# EAGLE board gps-1350-manu (EAGLE 7.5.0)
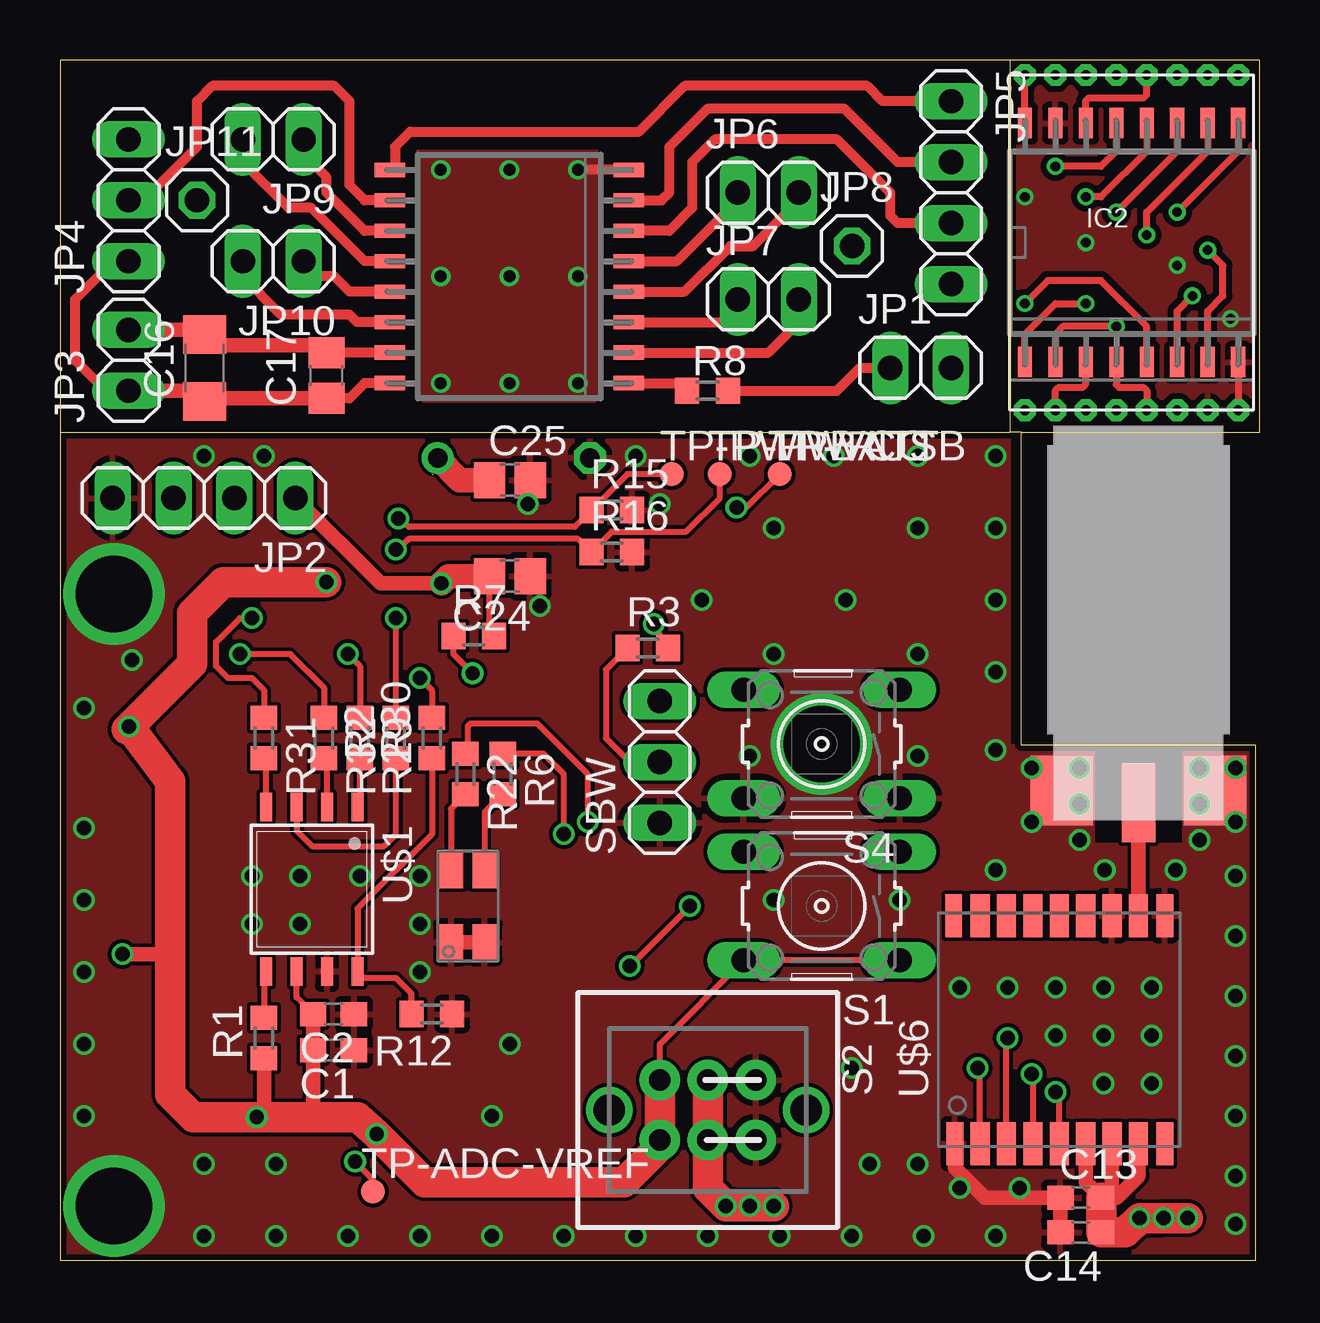
[diagram p0: board, top side]
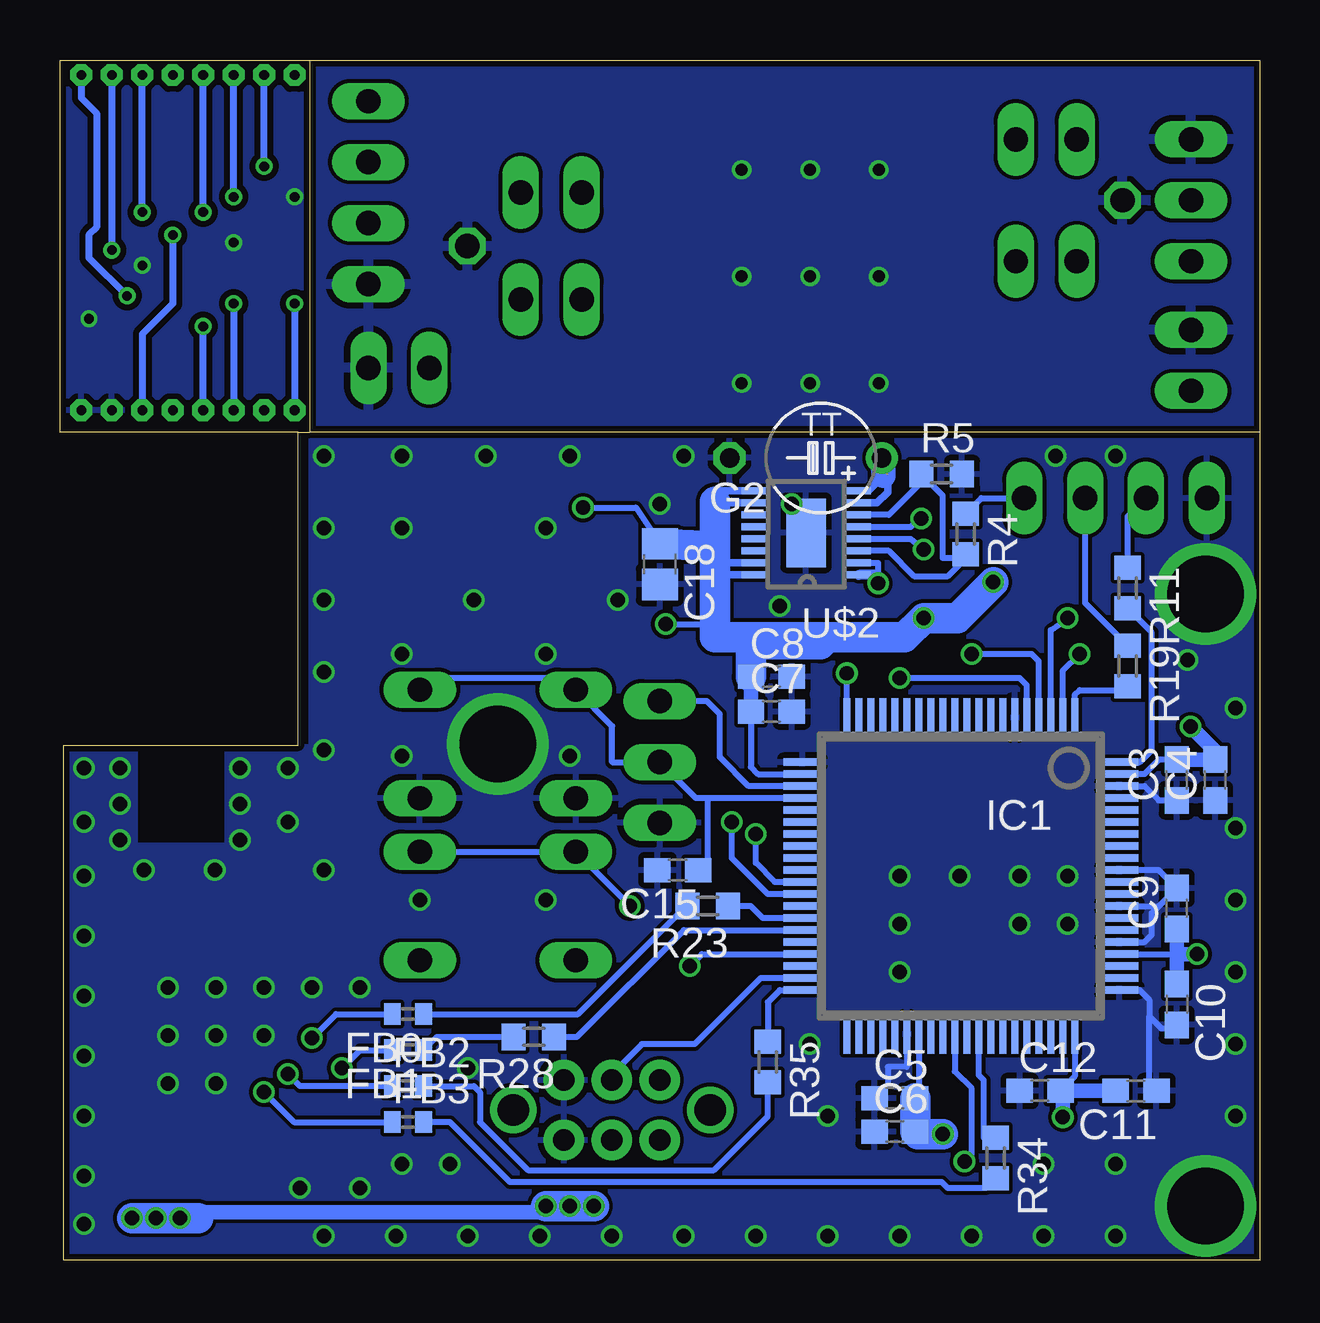
[diagram p1: board, bottom side, seen from below]

Size 50 x 50 mm. Coordinates in mm from the lower left corner, seen from the top.
Outline: 40.07,34.5 40.07,21.45 49.85,21.45 49.85,0 0,0 0,34.5
Outline: 40.07,34.5 39.6,34.5
Outline: 0,34.5 39.6,34.5
Outline: 39.6,50 0,50 0,34.5
Outline: 40.07,34.5 50,34.5 50,50 39.6,50
Outline: 39.6,50 39.6,34.5
Copper layers (1*16): Top 0.035mm / dielectric 1.5mm / Bottom 0.035mm
Design rules "SeeedStudio_2layer_DRU_no_angle_20140221": minimum track width 6mil, minimum drill 12mil, track to track 6mil, track to pad 6mil, pad to pad 6mil, via to via 6mil, smd to smd 0mil, copper to edge 10mil, drill to drill 10mil, minimum pad ring 10mil, minimum via ring 6mil, stop-mask expansion 2mil, vias tented up to drill 100mil, thermal gap 10mil
Net classes: 0 signal: width 0.254 mm, drill 0.254 mm, clearance 0.025 mm; 1 charimp50: width 0.61 mm, drill 0.254 mm, clearance 0.559 mm

## Footprints (pad centres in the part's own frame; a part is rotated, then mirrored left to right if it is on the bottom)
C0603 = smd 1.1 x 1: 1 -0.85,0; 2 0.85,0
C_1206 = smd 1.6 x 1.8: 1 -1.4,0; 2 1.4,0
C_0805 = smd 1.3 x 1.5: 1 -0.95,0; 2 0.95,0
C0805 = smd 1.3 x 1.5: 1 -0.85,0; 2 0.85,0
R0402 = smd 0.7 x 0.9: 1 -0.65,0; 2 0.65,0
TAP5-45 = drill 0.813: + -2.54,0 | drill 0.813 octagon: - 3.81,0
PN_S-PQFP-G80 = smd 0.3 x 1.6: 1 -4.75,-6.6; 2 -4.25,-6.6; 3 -3.75,-6.6; 4 -3.25,-6.6; 5 -2.75,-6.6; 6 -2.25,-6.6; 7 -1.75,-6.6; 8 -1.25,-6.6; 9 -0.75,-6.6; 10 -0.25,-6.6; 11 0.25,-6.6; 12 0.75,-6.6; 13 1.25,-6.6; 14 1.75,-6.6; 15 2.25,-6.6; 16 2.75,-6.6; 17 3.25,-6.6; 18 3.75,-6.6; 19 4.25,-6.6; 20 4.75,-6.6; 41 4.75,6.6; 42 4.25,6.6; 43 3.75,6.6; 44 3.25,6.6; 45 2.75,6.6; 46 2.25,6.6; 47 1.75,6.6; 48 1.25,6.6; 49 0.75,6.6; 50 0.25,6.6; 51 -0.25,6.6; 52 -0.75,6.6; 53 -1.25,6.6; 54 -1.75,6.6; 55 -2.25,6.6; 56 -2.75,6.6; 57 -3.25,6.6; 58 -3.75,6.6; 59 -4.25,6.6; 60 -4.75,6.6 | smd 1.6 x 0.3: 21 6.6,-4.75; 22 6.6,-4.25; 23 6.6,-3.75; 24 6.6,-3.25; 25 6.6,-2.75; 26 6.6,-2.25; 27 6.6,-1.75; 28 6.6,-1.25; 29 6.6,-0.75; 30 6.6,-0.25; 31 6.6,0.25; 32 6.6,0.75; 33 6.6,1.25; 34 6.6,1.75; 35 6.6,2.25; 36 6.6,2.75; 37 6.6,3.25; 38 6.6,3.75; 39 6.6,4.25; 40 6.6,4.75; 61 -6.6,4.75; 62 -6.6,4.25; 63 -6.6,3.75; 64 -6.6,3.25; 65 -6.6,2.75; 66 -6.6,2.25; 67 -6.6,1.75; 68 -6.6,1.25; 69 -6.6,0.75; 70 -6.6,0.25; 71 -6.6,-0.25; 72 -6.6,-0.75; 73 -6.6,-1.25; 74 -6.6,-1.75; 75 -6.6,-2.25; 76 -6.6,-2.75; 77 -6.6,-3.25; 78 -6.6,-3.75; 79 -6.6,-4.25; 80 -6.6,-4.75
FLAT16-ADP = drill 0.4 octagon: 1 -4.445,-6.985; 2 -3.175,-6.985; 3 -1.905,-6.985; 4 -0.635,-6.985; 5 0.635,-6.985; 6 1.905,-6.985; 7 3.175,-6.985; 8 4.445,-6.985; 9 4.445,6.985; 10 3.175,6.985; 11 1.905,6.985; 12 0.635,6.985; 13 -0.635,6.985; 14 -1.905,6.985; 15 -3.175,6.985; 16 -4.445,6.985
1X02 = drill 1.016 long: 1 -1.27,0; 2 1.27,0
1X04 = drill 1.016 long: 1 -3.81,0; 2 -1.27,0; 3 1.27,0; 4 3.81,0
1X03 = drill 1.016 long: 1 -2.54,0; 2 0,0; 3 2.54,0
1X01 = drill 1.016 octagon: 1 0,0
BILED = smd 1.5 x 1: 1 -1.5,0.7; 2 1.5,0.7; 3 -1.5,-0.7; 4 1.5,-0.7
R0603 = smd 1 x 1.1: 1 -0.85,0; 2 0.85,0
R_0603 = smd 1 x 1.1: 1 -0.85,0; 2 0.85,0
B3F-10XX = drill 1.016 long: 1 -3.251,2.261; 2 3.251,2.261; 3 -3.251,-2.261; 4 3.251,-2.261
2P2T = drill 0.9 pad 1.676: 1.1 -2,1.25; 1.2 -2,-1.25; 2.1 0,1.25; 2.2 0,-1.25; 3.1 2,1.25; 3.2 2,-1.25 | drill 1.3 pad 1.93: 3.3 4.1,0; 3.4 -4.1,0
TP10R = smd 1 x 1: TP 0,0
JSOP-08 = smd 0.5 x 1.2: 1 -1.905,-3.429; 2 -0.635,-3.429; 3 0.635,-3.429; 4 1.905,-3.429; 5 1.913,3.429; 6 0.643,3.429; 7 -0.627,3.429; 8 -1.897,3.429
MSOP16 = smd 1 x 0.3: 1 -2.2,1.75; 2 -2.2,1.25; 3 -2.2,0.75; 4 -2.2,0.25; 5 -2.2,-0.25; 6 -2.2,-0.75; 7 -2.2,-1.25; 8 -2.2,-1.75; 9 2.2,-1.75; 10 2.2,-1.25; 11 2.2,-0.75; 12 2.2,-0.25; 13 2.2,0.25; 14 2.2,0.75; 15 2.2,1.25; 16 2.2,1.75 | smd 1.65 x 2.85: EXP 0,0
SO16-WS = smd 0.6 x 1.27: 1 -4.445,-4.981; 2 -3.175,-4.981; 3 -1.905,-4.981; 4 -0.635,-4.981; 5 0.635,-4.981; 6 1.905,-4.981; 7 3.175,-4.981; 8 4.445,-4.981; 9 4.445,4.981; 10 3.175,4.981; 11 1.905,4.981; 12 0.635,4.981; 13 -0.635,4.981; 14 -1.905,4.981; 15 -3.175,4.981; 16 -4.445,4.981
MWSL1350 = smd 2.6 x 2.9: P$1 -3.2,-1.45; P$3 3.2,-1.45 | smd 1.4 x 3.3: P$2 0,-1.95
MAX-8 = smd 1.8 x 0.7: 1 9.6,0.7; 9 9.6,9.45; 10 0.1,9.45; 18 0.1,0.65 | smd 1.8 x 0.8: 2 9.6,1.75; 3 9.6,2.85; 4 9.6,3.95; 5 9.6,5.05; 6 9.6,6.15; 7 9.6,7.25; 8 9.6,8.35; 11 0.1,8.35; 12 0.1,7.25; 13 0.1,6.15; 14 0.1,5.05; 15 0.1,3.95; 16 0.1,2.85; 17 0.1,1.75

## Placement (x,y rotation side)
C1  1u  [C0603]  11.4,8.75 180 top
C2  100n  [C0603]  11.4,10.25 180 top
C3  100n  [C0603]  3.45,20 90 bottom
C4  1u  [C0603]  1.85,20 90 bottom
C5  100n  [C0603]  15.2,6.75 0 bottom
C6  1u  [C0603]  15.2,5.35 0 bottom
C7  100n  [C0603]  20.35,22.85 0 bottom
C8  1u  [C0603]  20.35,24.3 0 bottom
C9  100n  [C0603]  3.45,14.65 90 bottom
C10  1u  [C0603]  3.45,10.65 270 bottom
C11  100n  [C0603]  5.15,7.05 180 bottom
C12  1u  [C0603]  9.15,7.05 0 bottom
C13  100n  [C0603]  42.55,2.6 0 top
C14  1u  [C0603]  42.55,1.15 180 top
C15  1 n  [C0603]  24.25,16.25 180 bottom
C16  1uF  [C_1206]  6.03,37.17 90 top
C17  100nF  [C_0805]  11.11,36.85 90 top
C18  4.7uF at least  [C0805]  25,29 270 bottom
C24  4.7uF  [C0805]  18.75,28.5 180 top
C25  4.7uF at least  [C0805]  18.75,32.5 0 top
FB0  [R0402]  35.5,10.25 180 bottom
FB1  [R0402]  35.5,8.75 180 bottom
FB2  [R0402]  35.5,7.25 0 bottom
FB3  [R0402]  35.5,5.75 0 bottom
G2  BATTERYTAP5-45  [TAP5-45]  18.28,33.42 180 bottom
IC1  MSP430FR698X(1)80-PIN_PN  [PN_S-PQFP-G80]  12.45,16 180 bottom
IC2  74HC4051ADP  [FLAT16-ADP]  44.66,42.39 0 top
JP1  [1X02]  35.88,37.17 0 top
JP2  [1X04]  6,31.75 180 top
JP3  [1X02]  2.85,37.49 90 top
JP4  [1X03]  2.85,44.16 90 top
JP5  [1X04]  37.15,44.47 270 top
JP6  [1X02]  29.52,44.47 0 top
JP7  [1X02]  29.52,40.03 0 top
JP8  [1X01]  33.02,42.25 0 top
JP9  [1X02]  8.89,46.7 180 top
JP10  [1X02]  8.89,41.62 180 top
JP11  [1X01]  5.71,44.16 0 top
LED1  [BILED]  17,14.75 90 top
R1  470k  [R0603]  8.5,9.25 90 top
R2  470k  [R0603]  14,21.75 90 top
R3  47k  [R0603]  24.5,25.5 0 top
R4  100k  [R0603]  12.25,30.25 270 bottom
R5  39.2k  [R0603]  13.25,32.75 0 bottom
R6  160  [R0603]  18.45,20.25 270 top
R7  100  [R0603]  17.25,26 0 top
R8  [R_0603]  26.98,36.22 0 top
R11  100  [R0603]  5.5,28 270 bottom
R12  470k  [R0603]  15.5,10.25 180 top
R15  1k  [R0603]  23,31.25 0 top
R16  1k  [R0603]  23,29.5 0 top
R19  100  [R0603]  5.5,24.75 270 bottom
R22  180  [R0603]  16.9,20.25 270 top
R23  100  [R0603]  23,14.75 180 bottom
R28  100  [R0603]  30.25,9.3 180 bottom
R29  100  [R0603]  12.5,21.75 270 top
R30  100  [R0603]  15.5,21.75 90 top
R31  100  [R0603]  8.5,21.75 270 top
R32  100  [R0603]  11,21.75 270 top
R34  0  [R0603]  11,4.25 270 bottom
R35  0  [R0603]  20.5,8.25 270 bottom
S1  [B3F-10XX]  31.75,14.75 180 top
S2  2P2T  [2P2T]  27,6.25 180 top
S4  RESET  [B3F-10XX]  31.75,21.5 180 top
SBW  [1X03]  25,20.75 90 top
TP-ADC-VREF  TPSQTP10R  [TP10R]  13.05,2.85 0 top
TP-PWRBATT  TPSQTP10R  [TP10R]  25.5,32.75 0 top
TP-PWRUSB  TPSQTP10R  [TP10R]  27.5,32.75 0 top
TP-VCC  TPSQTP10R  [TP10R]  30,32.75 0 top
U$1  AT45DB641E-SHNJSOP-08  [JSOP-08]  10.5,15.45 180 top
U$2  LTC4415  [MSOP16]  18.9,30.3 180 bottom
U$3  RHD5928  [SO16-WS]  18.73,40.98 90 top
U$4  RHD5928  [SO16-WS]  44.66,42.39 0 top
U$5  MWSL1251MWSL1350  [MWSL1350]  44.95,21.01 0 top
U$6  MAX-8C-0  [MAX-8]  36.6,14.45 270 top

## Library data of the parts
C1-C15 C18 C24 C25 = tagps; SPICEPREFIX: C
C16 C17 IC2 JP1 JP3 JP6 JP7 JP9 JP10 R8 U$3 U$4 = juice
FB0 FB1-FB3 R1-R7 R11 R12 R15 R16 R19 R22 R23 R28-R32 R34 R35 = tagps; SPICEPREFIX: R
G2 IC1 JP2 LED1 S2 SBW TP-ADC-VREF TP-PWRBATT TP-PWRUSB TP-VCC U$1 U$2 U$5 U$6 = tagps
JP4 JP5 JP8 JP11 = pinhead
S1 S4 = tagps; MPN: B3F-1000; OC_FARNELL: 176432; OC_NEWARK: 36M3542

## Nets
!EN: JP4.2 U$3.10
!EN1: IC2.6 U$4.10
+5V: C16.1 C17.1 JP3.1 JP4.1 U$3.16
+5V1: IC2.16 U$4.16
A0: JP5.1 U$3.9
A1: JP5.2 U$3.7
A2: JP5.3 U$3.6
A3: IC2.11 U$4.9
A4: IC2.10 U$4.7
A5: IC2.9 U$4.6
ADC-BATT: R15.1 TP-PWRBATT.TP U$2.5
ADC-VREF: IC1.50 TP-ADC-VREF.TP
GND: C1.1 C2.1 C3.1 C4.1 C5.1 C6.1 C7.2 C8.2 C9.2 C10.2 C11.1 C12.1 C13.1 C14.2 C15.2 C18.2 C24.1 C25.2 G2.- IC1.6 IC1.21 IC1.46 IC1.61 IC1.65 IC1.68 IC1.71 IC1.78 JP2.4 LED1.1 LED1.3 R5.2 R12.1 R15.2 R16.2 S2.1.1 S2.1.2 S4.1 S4.2 SBW.1 U$1.7 U$2.EXP U$5.P$1 U$5.P$3 U$6.1 U$6.10 U$6.12
GND1: C16.2 C17.2 JP1.2 JP3.2 JP4.3 JP5.4 JP8.1 JP11.1 U$3.8 U$3.15
GND2: IC2.7 IC2.8 U$4.8 U$4.15
LED1: IC1.32 R22.1
LED2: IC1.31 R6.1
MB-GPS-RX: FB0.1 R23.2
MB-GPS-TIMEPULSE: IC1.40 R35.1
MB-GPS-TX: FB1.1 R28.2
MB-GPS-WAKEUP: IC1.52 R34.1
MB-PWR_GPS_SENSE: C13.2 C14.1 IC1.39 S2.2.1 S2.2.2 U$6.6 U$6.7 U$6.8
MCU-RX-FT232: IC1.1 R19.2
MCU-TX-FT232: JP2.3 R11.1
N$1: R8.1 U$3.1
N$2: IC1.80 R11.2
N$7: R4.2 R5.1 U$2.3 U$2.6
N$25: R2.1 U$1.3
N$26: R1.2 U$1.5
N$27: R16.1 TP-PWRUSB.TP U$2.4
N$30: IC1.4 R29.1
N$31: R12.2 R30.1 U$1.8
N$35: IC1.3 R31.1
N$36: IC1.2 R32.1
N$37: LED1.4 R6.2
N$38: LED1.2 R22.2
N$40: IC1.34 R23.1
N$42 [charimp50]: U$5.P$2 U$6.11
N$43: JP2.2 R19.1
N$46: FB3.2 R34.2
N$47: FB2.2 R35.2
N$48: IC1.35 R28.1
N$49: FB0.2 U$6.3
N$50: FB1.2 U$6.2
N$51: FB2.1 U$6.4
N$52: FB3.1 U$6.5
PWR-USB-SENSE: IC1.20 R7.1
SBW-TCK: IC1.23 SBW.3
SBW-TDO/TDI: C15.1 IC1.24 R3.1 S4.3 S4.4 SBW.2
SPICLK: R32.2 U$1.2
SPICSN: R31.2 U$1.4
SPISI: R29.2 U$1.1
SPISO: IC1.5 R30.2
SW-CFG-GPS: IC1.37 S1.3 S1.4
VCC: C1.2 C2.2 C3.2 C4.2 C5.2 C6.2 C7.1 C8.1 C9.1 C10.1 C11.2 C12.2 C18.1 IC1.22 IC1.47 IC1.60 IC1.64 IC1.79 R1.1 R2.2 R3.2 S1.1 S1.2 S2.3.1 S2.3.2 TP-VCC.TP U$1.6 U$2.9 U$2.10 U$2.15 U$2.16
VCC_BATT_IN: C25.1 G2.+ U$2.7 U$2.8
VCCUSBGPS: C24.2 JP2.1 R4.1 R7.2 U$2.1 U$2.2
X: JP1.1 R8.2
X0: JP9.1 U$3.11
X1: JP9.2 U$3.12
X2: JP10.1 U$3.13
X3: JP10.2 U$3.14
X4: JP6.1 U$3.5
X5: JP6.2 U$3.4
X6: JP7.1 U$3.3
X7: JP7.2 U$3.2
X8: IC2.13 U$4.11
X9: IC2.14 U$4.12
X10: IC2.15 U$4.13
X11: IC2.12 U$4.14
X12: IC2.1 U$4.5
X13: IC2.5 U$4.4
X14: IC2.2 U$4.3
X15: IC2.4 U$4.2
X16: IC2.3 U$4.1

## Tracks (layer width: path | path; a pad name or v marks a point on that pad's centre or on a via)
!EN
  Top 0.406: U$3.10 12.7,44.16 12.06,44.79 12.06,48.28 11.43,48.92 6.35,48.92 5.71,48.28 5.71,46.38 3.49,44.16 JP4.2
!EN1  (via drill 0.4)
  Top 0.3: U$4.10 47.84,46.2 45.3,43.66 v45.3,42.71
  Bottom 0.3: v45.3,42.71 45.3,39.85 46.57,38.58 IC2.6
+5V
  Top 0.406: JP4.1 2.22,41.62 0.63,40.03 0.63,37.49 1.9,36.22 JP3.1 | U$3.16 12.7,36.53 12.06,35.9 C17.1 | 6.16,35.9 C16.1
  Top 0.61: JP3.1 5.53,36.22 C16.1 | C17.1 6.16,35.9
+5V1
  Top 0.3: U$4.16 IC2.16
A0
  Top 0.406: JP5.1 34.29,48.28 33.65,48.92 26.03,48.92 24.13,47.01 14.6,47.01 13.97,46.38 13.97,45.64 U$3.9
A1
  Top 0.406: U$3.7 25.08,44.16 25.4,44.47 25.4,46.38 26.98,47.97 32.7,47.97 34.92,45.74 JP5.2
A2
  Top 0.406: JP5.3 34.92,43.2 34.6,43.52 34.6,44.47 32.38,46.7 27.3,46.7 26.35,45.74 26.35,43.84 25.4,42.88 U$3.6
A3  (via drill 0.4)
  Top 0.3: U$4.9 49.11,46.2 v46.57,43.66
  Bottom 0.3: v46.57,43.66 IC2.11
A4  (via drill 0.4)
  Top 0.3: U$4.7 47.84,39.53 48.48,40.17 48.48,41.44 v47.84,42.08
  Bottom 0.3: IC2.10 v47.84,42.08
A5  (via drill 0.4)
  Top 0.3: U$4.6 46.57,39.53 v47.2,40.17
  Bottom 0.3: v47.2,40.17 48.79,41.76 48.79,42.71 48.48,43.03 48.48,47.79 49.11,48.42 IC2.9
ADC-BATT  (via drill 0.6)
  Top 0.254: v14.1,30.9 14.55,30.55 21.45,30.55 R15.1 23.65,32.75 TP-PWRBATT.TP
  Bottom 0.254: U$2.5 14.55,30.55 v14.1,30.9
ADC-VREF  (via drill 0.6)
  Top 0.254: TP-ADC-VREF.TP 13.05,3.35 v12.3,4.1
  Bottom 0.254: IC1.50 12.7,7.85 12,7.15 12,4.4 v12.3,4.1
GND  (via drill 0.6, 3.2 pad 3.81)
  Top 0.254: U$6.12 43.73,14.23
  Top 0.61: LED1.1 LED1.3 | U$6.1 37.3,3.85 38.55,2.6 C13.1 C14.2
  Bottom 0.254: 19.2,20.75 IC1.21 | 16.2,7.1 C5.1 15.5,7.3 15.5,8.05 14.7,8.05 IC1.46 | IC1.61 5,11.25 4.6,10.85 4.6,10.15 | 4.6,10.15 4.1,9.65 3.6,9.65 C10.2 | IC1.78 4.8,19.75 4.2,19.15 C3.1 | 4.3,7.15 4.6,7.45 4.6,10.15 | IC1.71 4.2,16.25 C9.2 4.2,14.75 | IC1.68 4.2,14.75 | IC1.65 4.8,13.25 4.5,13.55 4.5,14.45 4.2,14.75
  other vias: 15,12 8,14 10,14 15,14 15,16 12.5,16 10,16 8,16 39,30.5 45.5,11.35 43.5,11.35 41.5,11.35 45.5,9.35 43.5,9.35 43.5,7.35 41.5,9.35 45.5,7.35 39.5,11.35 37.5,11.35 32.25,33.5 42.5,17.5 43.55,16.25 49,20.5 47.5,20.5 39,27.5 25,31.5 39,33.5 35.75,33.5 35.75,30.5 20,27.25 19.5,31.5 39,24.5 39,21.25 40.5,20.5 42.5,20.5 42.5,19 49,18.25 49,16 47.5,19 47.5,17.5 46.5,16.25 49,13.5 49,11 49,8.5 49,6 49,3.5 49,1.5 39,1 39,16.25 40.5,18.25 36,1 33,1 27,1 30,1 24,1 21,1 18,1 15,1 12,1 9,1 6,1 6,4 9,4 1,6 1,9 1,12 1,15 1,18 1,23 3,25 35.75,4 33.75,4 33,8 35,15 29.75,15 18,6 18.75,9 32.75,27.5 35.75,21 31.75,21.5 2.25,2.25 2.25,27.75 40,3 37.5,3 29.75,30.5 28.75,33.5 24,33.5 8.5,33.5 6,33.5 26.75,27.5 28.75,21 35.75,25.25 29.75,25.25
  pour Top: -1.35,35.35 38.75,35.25 41.65,34.65 41.5,21.5 37.25,21.5 37.25,17.1 39,17.1 50.75,17.35 51.15,-2 -1.1,-2.25
  pour Bottom: -2.8,36 50.35,35.4 51.05,-1.05 -3.2,-1.4 -3,4.5 -3,7.5
  pour Top (no thermals): 37.25,22 51.25,22 51.25,16.75 37.25,16.75
GND1  (via drill 0.5)
  Top 0.406: U$3.8 v21.59,45.42 | C16.2 6.22,38.57 | 10.79,38.12 C17.2 U$3.15
  Top 0.61: JP3.2 5.84,38.76 C16.2 | 6.22,38.57 6.67,38.12 10.79,38.12
  other vias: 15.87,45.42 15.87,36.53 21.59,36.53 15.87,40.98 21.59,40.98 18.73,40.98 18.73,45.42 18.73,36.53
  pour Bottom: 0.32,49.87 39.37,49.87 39.37,34.95 0.32,34.95
  pour Top (isolate 0.5): 15.24,35.9 15.08,46.27 22.22,46.27 22.22,35.9
GND2  (via drill 0.4)
  Top 0.3: U$4.8 IC2.8
  other vias: 42.76,42.39 46.57,41.44 40.22,44.3 48.79,39.22
  pour Bottom (isolate 0.25): 39.59,49.38 49.74,49.38 49.74,35.41 39.59,35.41
  pour Top (isolate 0.25): 39.59,49.38 49.74,49.38 49.74,35.41 39.59,35.41
LED1  (via drill 0.6)
  Top 0.254: R22.1 17,21.2 17,22.25 17.1,22.35 19.9,22.35 22,20.25 v22,18.25
  Bottom 0.254: IC1.32 20.5,15.25 22,16.75 v22,18.25
LED2  (via drill 0.6)
  Top 0.254: v21,17.75 21,20.25 20.15,21.1 R6.1
  Bottom 0.254: IC1.31 20.2,15.75 21,16.55 v21,17.75
MB-GPS-RX
  Bottom 0.254: R23.2 23.9,14.75 28.4,10.25 FB0.1
MB-GPS-TIMEPULSE
  Bottom 0.254: IC1.40 20,11.25 20.5,10.75 R35.1
MB-GPS-TX
  Bottom 0.254: FB1.1 34.3,9.3 R28.2
MB-GPS-WAKEUP
  Bottom 0.254: IC1.52 11.7,7.7 11.5,7.5 11.5,5.1 R34.1
MB-PWR_GPS_SENSE  (via drill 0.6)
  Top 0.254: 44.05,2.6 C13.2
  Top 0.61: U$6.7 43.85,3.05 C13.2 42.75,3.25 U$6.6 | 44.05,2.6 44.95,3.5 U$6.8
  Top 1.27: C13.2 C14.1 44.4,1.15 v45,1.75 v46,1.75 v47,1.75 | S2.2.2 S2.2.1 27,3 v27.75,2.25 v28.75,2.25 v29.75,2.25
  Bottom 0.254: IC1.39 20.8,11.75 23.55,9 25.75,9 27,7.75 S2.2.2
  Bottom 0.61: v29.75,2.25 arc90 30,2 44,2 44.25,1.75
  Bottom 1.27: v27.75,2.25 v28.75,2.25 v29.75,2.25 | 44.25,1.75 v45,1.75 v47,1.75
MCU-RX-FT232
  Bottom 0.254: IC1.1 7.7,23.55 7.5,23.75 5.65,23.75 R19.2
MCU-TX-FT232
  Bottom 0.254: R11.1 5.5,30.98 JP2.3
N$1
  Top 0.406: U$3.1 25.82,36.53 R8.1
N$2
  Bottom 0.254: IC1.80 5,20.75 4.5,21.25 4.5,26.15 R11.2
N$7
  Bottom 0.254: U$2.3 15.45,29.55 14.4,28.5 13,28.5 12.25,29.25 | U$2.6 15.45,31.05 14.1,32.4 R5.1 13.2,31.85 13.2,29.25 12.25,29.25 | 12.25,29.25 R4.2
N$25
  Top 0.254: U$1.3 9.87,17.89 10.5,17.25 13.5,17.25 14,17.75 R2.1
N$26
  Top 0.254: U$1.5 8.5,11.93 R1.2
N$27  (via drill 0.6)
  Top 0.254: v14,29.6 14.55,30.05 21.6,30.05 R16.1 23,30.35 26.1,30.35 27.5,31.75 TP-PWRUSB.TP
  Bottom 0.254: U$2.4 14.55,30.05 v14,29.6
N$30  (via drill 0.6)
  Top 0.254: v12,25.25 12.5,24.75 R29.1
  Bottom 0.254: IC1.4 9.2,24.95 9.5,25.25 v12,25.25
N$31
  Top 0.254: R30.1 15.5,17.75 12.4,14.65 U$1.8 | 12.5,11.92 U$1.8 | R12.2 14.65,11.1 14,11.75 12.67,11.75 U$1.8
N$35  (via drill 0.6)
  Top 0.254: R31.1 8.5,23.75 8,24.25 7,24.25 6.5,24.75 6.5,25.75 7.5,26.75 v8,26.75
  Bottom 0.254: IC1.3 8.7,26.25 v8,26.75
N$36  (via drill 0.6)
  Top 0.254: R32.1 11,23.85 9.6,25.25 v7.5,25.25
  Bottom 0.254: IC1.2 8.2,24.55 v7.5,25.25
N$37
  Top 0.254: R6.2 17.7,18.65 LED1.4
N$38
  Top 0.254: R22.2 16.3,18.8 LED1.2
N$40
  Bottom 0.254: IC1.34 20.7,14.25 21.2,14.75 R23.1
N$42
  Top 0.61: 44.9,14.35 U$6.11 U$5.P$2
N$43
  Bottom 0.254: R19.1 7.27,27.37 JP2.2
N$46
  Bottom 0.254: R34.2 11.4,3 13,3 13.25,3.25 31.25,3.25 33.75,5.75 FB3.2
N$47
  Bottom 0.254: R35.2 20.5,6 22.75,3.75 30.5,3.75 32.5,5.75 32.5,7 32.75,7.25 FB2.2
N$48
  Bottom 0.254: IC1.35 24,13.75 28.45,9.3 R28.1
N$49  (via drill 0.6)
  Top 0.254: U$6.3 39.45,9.2 v39.5,9.25
  Bottom 0.254: v39.5,9.25 38.5,10.25 FB0.2
N$50  (via drill 0.6)
  Top 0.254: U$6.2 38.35,7.9 v38.25,8
  Bottom 0.254: v38.25,8 37.5,8.75 FB1.2
N$51  (via drill 0.6)
  Top 0.254: v40.5,7.75 40.55,7.7 U$6.4
  Bottom 0.254: FB2.1 40,7.25 v40.5,7.75
N$52  (via drill 0.6)
  Top 0.254: U$6.5 41.65,6.85 v41.5,7
  Bottom 0.254: v41.5,7 40.25,5.75 FB3.1
PWR-USB-SENSE  (via drill 0.6)
  Top 0.254: v17.2,24.45 16.4,25.25 R7.1
  Bottom 0.254: 17.2,22 IC1.20 v17.2,24.45
SBW-TCK
  Bottom 0.254: IC1.23 21.3,19.75 22.5,20.95 22.5,22.75 23.04,23.29 SBW.3
SBW-TDO/TDI
  Top 0.254: R3.1 22.75,24.6 22.75,21.75 23.75,20.75 SBW.2
  Bottom 0.254: IC1.24 23,19.25 | 23,19.25 23.5,19.25 SBW.2 26.99,20.75 26.99,22.25 S4.4 28.99,24.25 34.51,24.25 S4.3 | C15.1 23,16.65 23,19.25
SPICLK
  Top 0.254: U$1.2 11.13,20.9 R32.2
SPICSN
  Top 0.254: U$1.4 8.6,20.9 R31.2
SPISI
  Top 0.254: U$1.1 12.5,18.97 R29.2
SPISO  (via drill 0.6)
  Top 0.254: v15,24.25 15.5,23.75 R30.2
  Bottom 0.254: IC1.5 9.7,23.95 10,24.25 v15,24.25
SW-CFG-GPS  (via drill 0.6)
  Top 0.254: v26.25,14.75 v23.75,12.25
  Bottom 0.254: S1.3 S1.4 26.25,14.76 v26.25,14.75 | v23.75,12.25 23.25,12.75 IC1.37
VCC  (via drill 0.6)
  Top 0.254: 4.8,12.75 4.6,12.55 | C2.2 9.86,10.94 U$1.6 | R2.2 v14,26.75 | R1.1 8.2,8.1 | S2.3.2 25,8.99 S1.2 S1.1 | R3.2 v24.75,26.5 | v28.2,31.35 28.6,31.35 TP-VCC.TP
  Top 0.61: C2.2 C1.2 10.55,6 10.5,5.95 | v2.6,12.75 4.8,12.75 | v8.2,5.95 8.5,6.25 R1.1
  Top 1.27: 2.77,22.12 v2.88,22.23 | v2.88,22.23 4.6,19.95 4.6,12.55 4.6,6.9 5.55,5.95 v8.2,5.95 10.5,5.95 12.4,5.95 v13.2,5.25 15.2,3.25 23.5,3.25 25,4.75 S2.3.1 S2.3.2 | v11.1,28.25 6.8,28.25 5.5,26.95 5.5,24.85 v2.88,22.23
  Bottom 0.254: IC1.47 14.2,6.75 C5.2 | C3.2 4.2,20.85 4.8,20.25 IC1.79 | IC1.64 3.45,12.75 | IC1.60 7.7,7.65 C12.2 | C7.1 21.2,20.55 20.9,20.25 IC1.22 | v28.2,31.35 26,31.35 C18.1 | v24.75,26.5 22.7,26.5 | 21.2,25.65 22.7,25.65 22.7,26.25 | 22.15,29.05 22.7,29.05 22.7,29.25 | 22.7,31.6 22.4,31.6 22.4,31.8
  Bottom 0.305: U$2.9 22.7,32.05 22.7,31.6 | U$2.10 22.15,31.55 22.4,31.8 | U$2.15 22.15,29.05 22.4,28.8 22.15,28.55 U$2.16
  Bottom 0.61: C8.1 C7.1 | C10.1 3.45,12.75 | 3.45,12.75 C9.1 | C3.2 C4.2 1.85,21.2 v2.88,22.23 | C11.2 C12.2 8.2,6.95 v8.2,5.95 | 3.45,12.75 v2.6,12.75
  Bottom 1.27: 12.7,26.75 v14,26.75 | v13.2,5.25 14.25,5.25 C6.2 C5.2 | v14,26.75 14.8,25.95 22.7,25.95 22.7,26.25 22.7,26.5 22.7,29.25 22.7,29.75 | 18.3,25.65 21.2,25.65 C8.1 | v11.1,28.25 12.6,26.75 v14,26.75 | 22.7,29.75 22.7,31.6 | C18.1 22.7,29.75
VCC_BATT_IN  (1 unrouted)
  Top 1.016: C25.1 16.66,32.5 G2.+
  Bottom 0.254: 15.8,32.5 15.55,32.75
  Bottom 0.305: U$2.8 16.3,32.05 15.68,32.67 15.55,32.8 15.5,32.75 15.5,32 15.95,31.55 U$2.7
  Bottom 1.016: G2.+ 15.68,32.85 15.68,32.67
VCCUSBGPS  (via drill 0.6)
  Top 0.254: R7.2 17.9,26.2 C24.2
  Top 0.61: JP2.1 13.36,28.2 v15.9,28.2
  Top 1.016: C24.2 16.2,28.5 v15.9,28.2
  Bottom 0.254: U$2.2 15.9,29.05 v15.9,28.2 | R4.1 11.6,31.75 JP2.1
  Bottom 0.406: U$2.1 15.95,28.55 15.9,28.5 v15.9,28.2
X
  Top 0.406: R8.2 32.38,36.22 33.34,37.17 JP1.1
X0
  Top 0.406: U$3.11 12.7,42.88 11.11,44.47 11.11,45.11 10.16,46.06 JP9.1
X1
  Top 0.406: U$3.12 12.7,41.62 10.47,43.84 9.52,43.84 7.62,45.74 JP9.2
X2
  Top 0.406: U$3.13 12.06,40.34 11.43,40.98 10.79,40.98 JP10.1
X3
  Top 0.406: U$3.14 12.38,39.08 12.06,39.39 9.21,39.39 7.62,40.98 JP10.2
X4
  Top 0.406: U$3.5 25.71,41.62 28.25,44.16 JP6.1
X5
  Top 0.406: U$3.4 26.03,40.34 27.94,42.25 28.89,42.25 30.8,44.16 JP6.2
X6
  Top 0.406: U$3.3 27.94,39.08 28.25,39.39 JP7.1
X7
  Top 0.406: U$3.2 29.52,37.8 30.8,39.08 JP7.2
X8  (via drill 0.4)
  Top 0.3: U$4.11 46.57,46.2 v44.03,43.66
  Bottom 0.3: v44.03,43.66 IC2.13
X9  (via drill 0.4)
  Top 0.3: U$4.12 45.3,46.2 43.4,44.3 v42.76,44.3
  Bottom 0.3: v42.76,44.3 IC2.14
X10  (via drill 0.4)
  Top 0.3: U$4.13 44.03,46.2 43.4,45.57 v41.49,45.57
  Bottom 0.3: v41.49,45.57 IC2.15
X11
  Top 0.3: U$4.14 42.76,48.3 42.88,48.42 45.17,48.42 45.3,48.55 IC2.12
X12  (via drill 0.4)
  Top 0.3: U$4.5 45.3,38.9 43.4,40.8 41.17,40.8 v40.22,39.85
  Bottom 0.3: v40.22,39.85 IC2.1
X13
  Top 0.3: U$4.4 44.03,36.48 44.16,36.36 45.17,36.36 45.3,36.23 IC2.5
X14
  Top 0.3: IC2.2 41.49,36.23 41.62,36.36 42.63,36.36 42.76,36.48 U$4.3
X15  (via drill 0.4)
  Top 0.3: v44.03,38.9 41.81,38.9 41.49,38.58 U$4.2
  Bottom 0.3: IC2.4 v44.03,38.9
X16  (via drill 0.4)
  Top 0.3: U$4.1 40.22,38.58 41.49,39.85 v42.76,39.85
  Bottom 0.3: v42.76,39.85 IC2.3

## Text on the board
tText: X1 | X0 | A0 | GND | RHD5928 BB V1 | X4 | X5 | A1 | !EN | X3 | X2 | A3 | X6 | X7 | V+ | GND | GND | X | V+ | PWRBATT | PWRUSB | VCC | GND TX RX VCC | GND-RST-TST | CFG GPS | taGPS v1350-0.31 | ADC-VREF | GPS: ON - OFF